# Altium PCB GD_AirIrDA.PcbDoc
Units mil, origin at the board's own origin, x right, y up, seen from the top; angles counter-clockwise.
Board outline 3149.61 x 2007.87 mil, 2 copper layers (Top Layer, Bottom Layer); 77 components, 62 nets, 262 pads, 118 vias.
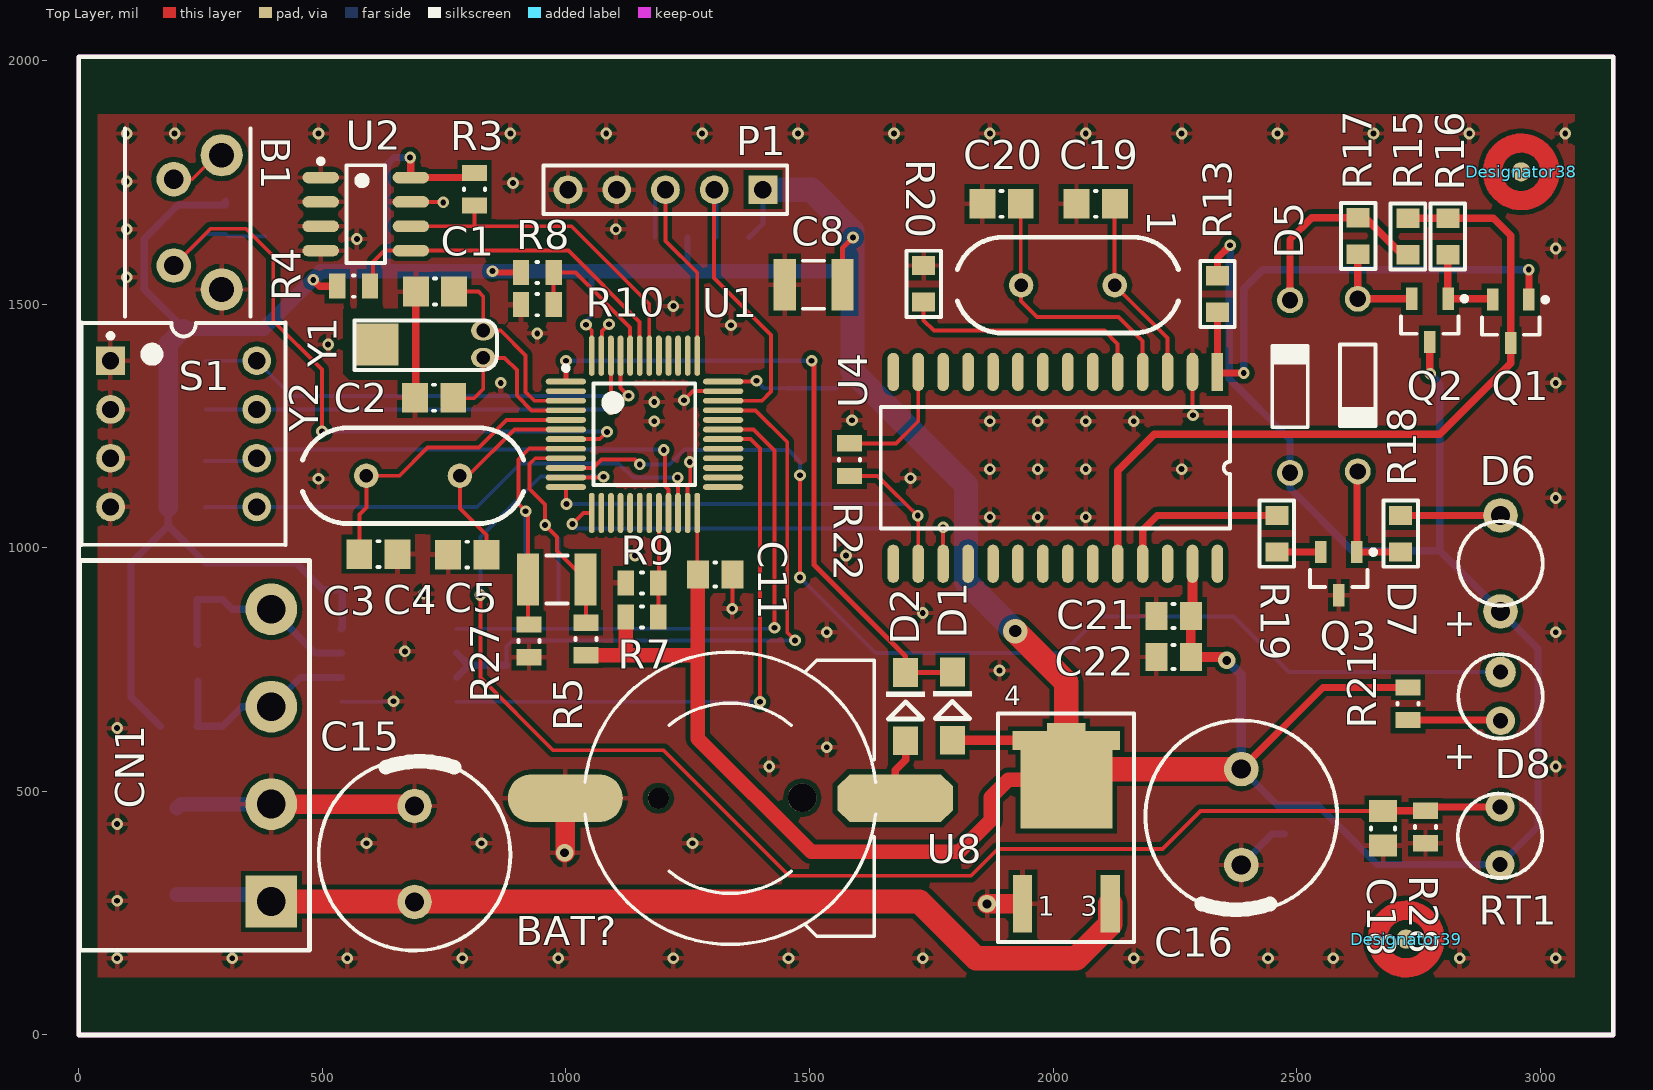
[diagram p0: Top Layer view]
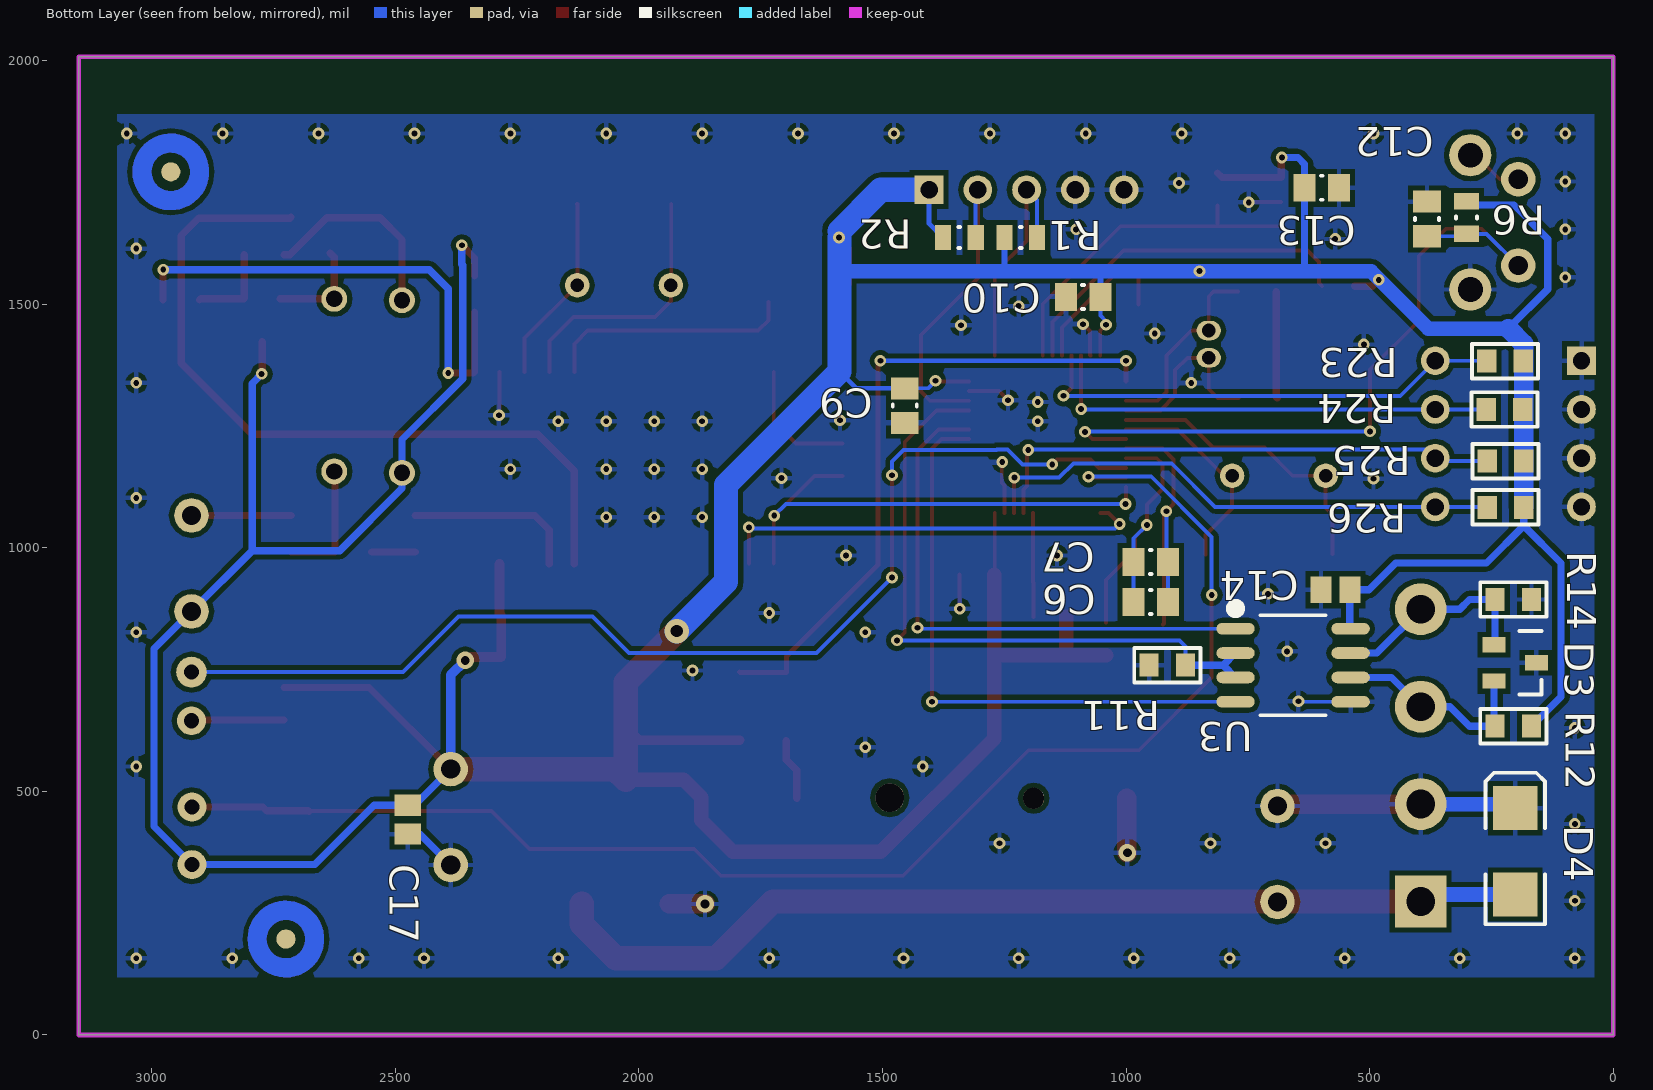
[diagram p1: Bottom Layer view, seen from below]

## Layer stack, top to bottom
Top Solder: solder mask 0.4, Solder Resist, Dk 3.5
Top Layer: signal copper 1.4
Dielectric 1: dielectric 12.6, FR-4, Dk 4.8
Bottom Layer: signal copper 1.4
Bottom Solder: solder mask 0.4, Solder Resist, Dk 3.5

## Board outline
0,0 3149.61,0 3149.61,2007.87 0,2007.87

## Design rules (kind name [scope] priority, off if disabled: settings)
Clearance [InPolygon] p1: gap=10 except(5: Track-SMDPad SMDPad-SMDPad)
Clearance Clearance_1 [All] p2: gap=10 except(5: Track-SMDPad SMDPad-SMDPad)
DiffPairsRouting [All] p1: maxlimit=10 minlimit=10 mostfreqgap=10 toplayer_minwidth=15 toplayer_maxwidth=15 toplayer_prefwidth=15 bottomlayer_minwidth=15 bottomlayer_maxwidth=15 bottomlayer_prefwidth=15 maxuncoupledlength=500
PlaneClearance [All] p1: clearance=40
PolygonConnect [All] p1: connectstyle=Relief reliefconductorwidth=10 reliefentries=4 polygonreliefangle="90 Angle" airgapwidth=10
RoutingVias [All] p1: holewidth=12 width=24 viastyle="Through Hole" minholewidth=12 minwidth=24 maxholewidth=28 maxwidth=50
SilkToSilkClearance [All] p1 off: silktosilkclearance=1
SilkToSolderMaskClearance [IsPad] p1 off: minsilkscreentomaskgap=10 clearancetoexposedcopper=TRUE
SolderMaskExpansion [All] p1: expansion=4
UnpouredPolygon [All] p1: allowunpoured=FALSE
Width [All] p1: maxlimit=50 minlimit=8 preferedwidth=15
25 further rules are at their usual default settings.

## Classes and differential pairs
component class GD_AirIrDA_Top: C18 D8 R21 R23 R24 R25 R26 R28 RT1 S1
component class U_GD_AirIrDA_MCU: B1 BAT? C1 C2 C3 C4 C5 C6 C7 C8 C9 C10 C11 C12 C13 D1 D2 P1 R1 R2 R3 R4 R5 R6 R7 R8 R9 R10 R27 U1 U2 Y1 Y2
component class U_GD_AirIrDA_485: C14 C15 C16 C17 CN1 D3 D4 R11 R12 R14 U3 U8
component class U_GD_AirIrDA_IrDA: 1 C19 C20 C21 C22 D5 D6 D7 Q1 Q2 Q3 R13 R15 R16 R17 R18 R19 R20 R22 U4
differential pair RS485: +RS485_P -RS485_N

## Components (designator, comment, footprint, x,y, rotation, side; value= is the part's Value field where it differs from the comment)
1 "12MHz" XTAL_US 1934.2,1538.94 r0 top
B1 "TVSE-21L" Button_V 244.2,1667.94 r270 top
BAT? "BATT" BATM 1337.2,485.94 r90 top
C1 "CAP 22pF 50V 0805(2012)" CAPC0805(2012)75_M 731.2,1525.94 r180 top
C2 "CAP 22pF 50V 0805(2012)" CAPC0805(2012)75_M 729.2,1307.94 r0 top
C3 "CAP 22pF 50V 0805(2012)" CAPC0805(2012)75_M 615.2,986.94 r180 top
C4 "CAP 22pF 50V 0805(2012)" CAPC0805(2012)75_M 797.2,985.94 r0 top
C5 "CAP 10uF 10V 1210(3225)" CAPC1210(3225)170_N 981.2,934.94 r0 top
C6 "CAP 0.01uF 50V 0805(2012)" CAPC0805(2012)100_N 949.2,888.94 r0 bottom
C7 "CAP 0.1uF 50V 0805(2012)" CAPC0805(2012)100_N 949.2,970.94 r0 bottom
C8 "CAP 10uF 10V 1210(3225)" CAPC1210(3225)170_N 1508.2,1539.94 r0 top
C9 "CAP 0.1uF 50V 0805(2012)" CAPC0805(2012)100_N 1454.2,1291.94 r90 bottom
C10 "CAP 0.1uF 50V 0805(2012)" CAPC0805(2012)100_N 1088.2,1514.94 r180 bottom
C11 "CAP 0.1uF 50V 0805(2012)" CAPC0805(2012)100_N 1306.2,944.94 r180 top
C12 "CAP 0.1uF 50V 0805(2012)" CAPC0805(2012)100_N 382.2,1674.94 r270 bottom
C13 "CAP 0.1uF 50V 0805(2012)" CAPC0805(2012)100_N 598.2,1738.94 r0 bottom
C14 "CAP" C0805 570.2,913.94 r0 bottom
C15 "CAPACITOR" CA10X16P5 689.2,469.94 r270 top
C16 "CAPACITOR" CA10X16P5 2386.2,348.94 r90 top
C17 "CAP" C0805 2474.2,441.94 r90 bottom
C18 "CAP 0.1uF 50V 0805(2012)" CAPC0805(2012)100_N 2677.2,423.94 r90 top
C19 "CAP 22pF 50V 0805(2012)" CAPC0805(2012)75_M 2087.2,1705.94 r180 top
C20 "CAP 22pF 50V 0805(2012)" CAPC0805(2012)75_M 1894.2,1705.94 r180 top
C21 "CAP 0.01uF 50V 0805(2012)" CAPC0805(2012)100_N 2247.2,859.94 r0 top
C22 "CAP 0.1uF 50V 0805(2012)" CAPC0805(2012)100_N 2247.2,775.94 r0 top
CN1 "Header 4" HT5.08-4P-H 395.2,273.94 r90 top
D1 "1N4148" DIODE_SOP 1793.2,604.94 r90 top
D2 "1N4148" DIODE_SOP 1697.2,603.94 r90 top
D3 "TVS-D" SOT23-123 205.2,763.94 r270 bottom
D4 "ZENER" SMB 201.2,376.94 r90 bottom
D5 "1N4148" NXP-SOD27-2_V 2486.2,1330.94 r90 top
D6 "IR" LED-5.0 2918.2,967.94 r90 top
D7 "1N4148" NXP-SOD27-2_V 2625.2,1333.94 r270 top
D8 "RED-LED" LED_DIP 2918.2,694.94 r90 top
Designator38 "Comment" MARK2 2960.63,1771.65 r0 top
Designator39 "Comment" MARK2 2724.41,196.85 r0 top
P1 "IIS" HDR1X5 1404.2,1734.94 r180 top
Q1 "QNPN" SOT-23B_N 2939.2,1464.94 r270 top
Q2 "PNP" SOT-23B_N 2773.2,1466.94 r270 top
Q3 "QNPN" SOT-23B_N 2586.2,946.94 r270 top
R1 "10K 5% 0805(2012)" RESC0805(2012)_L 1216.2,1636.94 r180 bottom
R2 "10K 5% 0805(2012)" RESC0805(2012)_L 1342.2,1636.94 r180 bottom
R3 "4.7K 5% 0805(2012)" RESC0805(2012)_L 812.2,1735.94 r270 top
R4 "4.7K 5% 0805(2012)" RESC0805(2012)_L 564.2,1536.94 r0 top
R5 "10Ohm 5% 0805(2012)" RESC0805(2012)_L 1041.2,812.94 r90 top
R6 "10K 5% 0805(2012)" RESC0805(2012)_L 301.2,1677.94 r270 bottom
R7 "10K 5% 0805(2012)" RESC0805(2012)_L 1156.2,857.94 r0 top
R8 "10K 5% 0805(2012)" RESC0805(2012)_L 941.2,1564.94 r0 top
R9 "10K 5% 0805(2012)" RESC0805(2012)_L 1156.2,927.94 r180 top
R10 "10K 5% 0805(2012)" RESC0805(2012)_L 941.2,1498.94 r180 top
R11 "RES" R0805 915.2,758.94 r180 bottom
R12 "RES" R0805 205.2,633.94 r0 bottom
R13 "10K" R0805 2337.2,1520.94 r90 top
R14 "RES" R0805 205.2,893.94 r180 bottom
R15 "12K" R0805 2728.2,1638.94 r270 top
R16 "15K" R0805 2810.2,1638.94 r270 top
R17 "27K" R0805 2626.2,1639.94 r90 top
R18 "1R" R0805 2713.2,1028.94 r90 top
R19 "1k" R0805 2459.2,1028.94 r270 top
R20 "1M" R0805 1734.2,1541.94 r270 top
R21 "470 Ohm 5% 0805(2012)" RESC0805(2012)_L 2728.2,679.94 r90 top
R22 "10K 5% 0805(2012)" RESC0805(2012)_L 1582.2,1180.94 r270 top
R23 "RES" R0805 222.2,1382.94 r0 bottom
R24 "RES" R0805 223.2,1283.94 r0 bottom
R25 "RES" R0805 221.2,1177.94 r0 bottom
R26 "RES" R0805 221.2,1082.94 r0 bottom
R27 "0 Ohm 5% 0805(2012)" RESC0805(2012)_L 924.2,808.94 r90 top
R28 "10K 5% 0805(2012)" RESC0805(2012)_L 2764.2,426.94 r270 top
RT1 "MF52 10K 3950K" NTC-MF52 2917.2,408.94 r90 top
S1 "SW-DIP4" SW_4P 215.2,1233.94 r0 top
U1 "STM32F103C8T6TR" STM-LQFP48_M 1161.2,1232.94 r0 top
U2 "AT24C02BN-SP25-T" 8S1_L 589.2,1684.94 r0 top
U3 "SN65HVD08D" SOIC8 775.2,833.94 r270 bottom
U4 "KT-003" IR-IC 2337.2,1360.94 r270 top
U8 "LM1117_ADJ" DPAK-134 2027.2,450.94 r0 top
Y1 "32.768K" XTAL32 830.2,1389.94 r180 top
Y2 "8MHz" XTAL_US 590.2,1147.94 r0 top

## Footprints (in the part's own frame and the unit in brackets; to place one, negate y for a bottom-side part, rotate by r counter-clockwise, add the part's x,y. Pads: shape width x height; smd on the part's side, far side on the other; paste and mask are expansions set on the pad)
8S1_L [mm] "SOIC, 8-Leads, Body 4.9x3.9mm, Pitch 1.27mm, IPC High Density"
  oval 1.9x0.6 smd: 1(-2.35,1.905) 2(-2.35,0.635) 3(-2.35,-0.635) 4(-2.35,-1.905) 5(2.35,-1.905) 6(2.35,-0.635) 7(2.35,0.635) 8(2.35,1.905)
  silkscreen extent -2.47,-2.55 1,2.88, body extent -1.99,-2.52 1.99,2.52, height 1.75
BATM [mm]
  round 1.1 hole 1.1 unplated: 0(0,3.748)
  round 1.5 hole 1.5 unplated: 0(0.025,-3.752)
  oct 2.5x6 smd: 1(0,-8.602)
  oval 2.5x6 smd: 2(0,8.598)
  silkscreen extent -7.62,-7.58 7.62,7.57
Button_V [mm] "6.3X6.3X13.8"
  round 1.8 hole 1: 1(-2.25,-1.25) 2(2.25,-1.25)
  round 2.2 hole 1.3: 3(-3.5,1.25) 4(3.5,1.25)
  silkscreen extent -4.9,-3.8 4.9,2.75, body extent -5,-13.25 5,2.85, height 7
C0805 [mm] "Chip Capacitor, Body 2.0x1.3mm, IPC High Density"
  rect 1.1x1.4 smd: 1(-0.75,0) 2(0.75,0)
  body extent -1.1,-0.72 1.1,0.72, height 1.4
CA10X16P5 [mm]
  round 1.8 hole 1: 1(0,0) 2(5,0)
  silkscreen extent -2.46,-5 7.54,5, body extent -2.47,-5.01 7.55,5.01, height 16
CAPC0805(2012)75_M [mm] "Chip Capacitor, Body 2.0x1.2mm, Height 0.75mm, IPC Low Density"
  rect 1.35x1.55 smd: 1(-1,0) 2(1,0)
  silkscreen extent -0.05,-0.67 0.05,0.67, body extent -1.1,-0.72 1.1,0.72, height 0.75
CAPC0805(2012)100_N [mm] "Chip Capacitor, Body 2.0x1.2mm, Height 1.0mm, IPC Medium Density"
  rect 1.15x1.45 smd: 1(-0.9,0) 2(0.9,0)
  silkscreen extent -0.05,-0.62 0.05,0.63, body extent -1.1,-0.72 1.1,0.73, height 1
CAPC1210(3225)170_N [mm] "Chip Capacitor, Body 3.2x2.5mm, Height 1.7mm, IPC Medium Density"
  rect 1.15x2.7 smd: 1(-1.5,0) 2(1.5,0)
  silkscreen extent -0.55,-1.25 0.55,1.25, body extent -1.7,-1.35 1.7,1.35, height 1.7
DIODE_SOP [mm]
  rect 1.5x1.3 smd: 1(0,0) 2(3.556,0)
  silkscreen extent 1.14,-1.02 2.56,1.02
DPAK-134 [mm] "LD1117"
  rect 1x3 smd: 1(-2.285,-4.6) 3(2.285,-4.6)
  rect 0.4x1 smd: 4(-2.6,3.9) 4(2.6,3.9)
  rect 4.8x5.1 smd: 4(0,1.85)
  rect 2x0.4 smd: 4(0,4.6)
  silkscreen extent -3.58,-6.6 3.52,5.3, body extent -3.15,-6.45 3.15,5.15, height 2.4
HDR1X5 [mm]
  rect 1.5x1.5 hole 0.9: 1(0,0)
  round 1.5 hole 0.9: 2(2.54,0) 3(5.08,0) 4(7.62,0) 5(10.16,0)
  silkscreen extent -1.27,-1.27 11.43,1.27
HT5.08-4P-H [mm]
  rect 2.7x2.7 hole 1.5: 1(0,0)
  round 2.7 hole 1.5: 2(5.08,0) 3(10.16,0) 4(15.24,0)
  silkscreen extent -2.54,-2 17.78,10, body extent -2.54,-2.03 17.78,10.03, height 12
IR-IC [mm]
  rect 2x0.6 smd: 1(0,0)
  oval 2x0.6 smd: 2(0,-1.3) 3(0,-2.6) 4(0,-3.9) 5(0,-5.2) 6(0,-6.5) 7(0,-7.8) 8(0,-9.1) 9(0,-10.4) 10(0,-11.7) 11(0,-13) 12(0,-14.3) 13(0,-15.6) 14(0,-16.9) 15(10,-16.9) 16(10,-15.6) 17(10,-14.3) 18(10,-13) 19(10,-11.7) 20(10,-10.4) 21(10,-9.1) 22(10,-7.8) 23(10,-6.5) 24(10,-5.2) 25(10,-3.9) 26(10,-2.6) 27(10,-1.3) 28(10,0)
  silkscreen extent 1.84,-17.55 8.17,0.65
LED-5.0 [mm]
  round 1.8 hole 1: 1(-2.5,0) 2(2.5,0)
  silkscreen extent -2.2,-2.2 2.2,2.2, body extent -2.48,-2.49 2.5,2.5, height 10
LED_DIP [mm]
  round 1.5 hole 0.8: 1(-1.27,0)
  round 1.6 hole 0.8: 2(1.27,0)
  silkscreen extent -2.2,-2.2 2.2,2.2, body extent -2.18,-2.2 2.2,2.2, height 5
MARK2 [mm]
  round 1 smd: 1(0,0)
  round 1 smd far side: 1(0,0)
  Top Layer circle w1: c0,0 r1.5
  Bottom Layer circle w1: c0,0 r1.5
NTC-MF52 [mm]
  round 1.5 hole 0.8: 1(-1.5,0) 2(1.5,0)
  silkscreen extent -2.2,-2.2 2.2,2.2, body extent -2.48,-2.49 2.5,2.5, height 10
NXP-SOD27-2_V [mm] "SOD27, 2-Leads, Dia 1.85mm, Body Length 4.25mm, Pin Spacing 9mm"
  round 1.35 hole 0.85: 1(-4.5,0) 2(4.5,0)
  silkscreen extent -2.12,-0.93 2.13,0.92, body extent -4.78,-0.92 4.78,0.92, height 1.84
R0805 [mm]
  rect 1x1.2 smd: 1(-0.95,0) 2(0.95,0)
  silkscreen extent -1.73,-0.9 1.73,0.9, body extent -1.55,-0.7 1.55,0.7, height 1
RESC0805(2012)_L [mm] "Chip Resistor, Body 2.0x1.3mm, IPC High Density"
  rect 0.85x1.3 smd: 1(-0.85,0) 2(0.85,0)
  silkscreen extent -0.05,-0.55 0.05,0.55, body extent -1.1,-0.67 1.1,0.68, height 0.7
SMB [mm] "DO-214-AA/SMB; 2 C-Bend Leads; Body 5.3 x 3.6 mm, inc. leads (LxW)"
  rect 2.3x2.3 smd: 1(-2.25,0) 2(2.25,0)
  silkscreen extent -3.8,-1.55 4.1,1.55
SOIC8 [mm]
  oval 0.61x2 smd: 1(0,0) 2(1.27,0) 3(2.54,0) 4(3.81,0) 5(3.81,6) 6(2.54,6) 7(1.27,6) 8(0,6)
  silkscreen extent -1.3,-0.25 4.51,4.7, body extent -0.7,1.3 4.51,4.7, height 1.75
SOT23-123 [mm]
  rect 0.8x1.2 smd: 1(-0.95,-1) 2(0.95,-1) 3(0,1.2)
  silkscreen extent -1.65,0.33 1.65,1.48, body extent -1.6,-1.3 1.6,1.3, height 1.2
SOT-23B_N [mm] "SOT23, 3-Leads, Body 2.9x1.3mm, Pitch 0.95mm, Lead Span 2.4mm, IPC Medium Density"
  rect 1.15x0.6 smd: 1(-1.125,0.95) 2(-1.125,-0.95) 3(1.125,0)
  silkscreen extent -1.25,-1.5 0.7,1.93, body extent -0.7,-1.5 0.7,1.5, height 1.14
STM-LQFP48_M [mm] "QFP, 48-Leads, Body 7x7mm, Pitch 0.5mm, IPC Low Density"
  oval 2.1x0.3 smd: 1(-4.1,2.75) 2(-4.1,2.25) 3(-4.1,1.75) 4(-4.1,1.25) 5(-4.1,0.75) 6(-4.1,0.25) 7(-4.1,-0.25) 8(-4.1,-0.75) 9(-4.1,-1.25) 10(-4.1,-1.75) 11(-4.1,-2.25) 12(-4.1,-2.75) 25(4.1,-2.75) 26(4.1,-2.25) 27(4.1,-1.75) 28(4.1,-1.25) 29(4.1,-0.75) 30(4.1,-0.25) 31(4.1,0.25) 32(4.1,0.75) 33(4.1,1.25) 34(4.1,1.75) 35(4.1,2.25) 36(4.1,2.75)
  oval 0.3x2.1 smd: 13(-2.75,-4.1) 14(-2.25,-4.1) 15(-1.75,-4.1) 16(-1.25,-4.1) 17(-0.75,-4.1) 18(-0.25,-4.1) 19(0.25,-4.1) 20(0.75,-4.1) 21(1.25,-4.1) 22(1.75,-4.1) 23(2.25,-4.1) 24(2.75,-4.1) 37(2.75,4.1) 38(2.25,4.1) 39(1.75,4.1) 40(1.25,4.1) 41(0.75,4.1) 42(0.25,4.1) 43(-0.25,4.1) 44(-0.75,4.1) 45(-1.25,4.1) 46(-1.75,4.1) 47(-2.25,4.1) 48(-2.75,4.1)
  silkscreen extent -4.22,-2.65 2.65,3.57, body extent -3.5,-3.5 3.5,3.5, height 1.6
SW_4P [mm]
  rect 1.5x1.5 hole 0.9: 1(-3.81,3.81)
  round 1.5 hole 0.9: 2(-3.81,1.27) 3(-3.81,-1.27) 4(-3.81,-3.81) 5(3.81,-3.81) 6(3.81,-1.27) 7(3.81,1.27) 8(3.81,3.81)
  silkscreen extent -5.32,-5.81 5.32,5.81, body extent -5.33,-5.71 5.33,5.71, height 9.8
XTAL32 [mil]
  oval 50x40 hole 28: 1(0,0) 2(0,-56)
  rect 92.13x86 smd: ""(220,-27)
  silkscreen extent -28,-77 264,25
XTAL_US [mil]
  round 50 hole 28: 1(0,0) 2(192.13,0)
  silkscreen extent -131,-98 323,98

## Part data
1 Y2: library part XTAL, "Crystal Oscillator"
B1: library part ES00012, "Button ON/OFF，11.85MM,DIP-4"
BAT?: library part BAT
C1 C2 C3 C4 C19 C20: library part CMP-1036-01234-1, "CAP 22pF 50V ±1% 0805 (2012 Metric) Thickness 0.75mm SMD"
C5 C8: library part CMP-1038-02199-1, "CAP 10uF 10V ±20% 1210 (3225 Metric) Thickness 1.7mm SMD"
C6 C7 C9 C10 C11 C12 C13 C18 C21 C22: library part CMP-1036-00070-1, "CAP 0.1uF 50V ±20% 0805 (2012 Metric) Thickness 1mm SMD"
C14 C17: library part EC00014, "CAP SMD CR X7R 50V 10% 0.1uF 0805 ROHS"
C15 C16: library part EC00095, "CAP 35V 20% 330uF 10X16X0.6MM ROHS，7000hours"
CN1: "Header, 4-Pin"
D1 D2: library part D
D3: library part ED00007, "DIODE TVS 7V 12V 17A 400W SOT-23 SMD ROHS"
D4: library part ED00032
D5 D7: library part CMP-0648-00002-1, "High-speed Diode, 100 V, 450 mA, 2-Pin SOD27, RoHS"
D6 D8: library part LED
P1: library part "Header 5", "Header, 5-Pin"
Q1 Q3: "NPN Bipolar Transistor"
Q2: "PNP Bipolar Transistor"
R1 R2 R6 R7 R8 R9 R10 R22 R28: library part CMP-1013-00098-1, "10K 0.125W 5% 0805 (2012 Metric)  SMD"
R3 R4: library part CMP-1013-00098-1, "4.7K 0.125W 5% 0805 (2012 Metric)  SMD"
R5 R27: library part CMP-1013-00098-1, "10Ohm 0.125W 5% 0805 (2012 Metric)  SMD"
R11 R23 R24 R25 R26: library part ER00213, "RES THICK_FILM SMD 10K ohm 5% 1/10W ROHS 0603"
R12 R14: library part ER00021, "RES THICK_FILM SMD 39K 5% 1/8W ROHS 0805"
R13 R15 R16 R17 R18 R19 R20: library part RES2
R21: library part CMP-1013-00098-1, "470Ohm 0.125W 5% 0805 (2012 Metric)  SMD"
RT1: library part "Res Thermal", "Thermistor"
S1: "侧拨 4位"
U1: library part CMP-0237-00216-3, "ARM Cortex-M3 32-bit MCU, 64 KB Flash, 20 KB Internal RAM, 37 I/Os, 48-pin LQFP, -40 to 85 degC, Tape and Reel"
U2: library part CMP-0152-00023-1, "2Kbit (256 x 8), 2-wire Bus Automotive Serial EEPROM with full memory Write Protect, 2.5V, 8-Pin SOIC, Tape & Reel"
U3: library part EU00041, "IC 5V,RS-485,10Mbps,16KV,TRANSCEIVERS,SOIC-8,ROHS"
U8: library part EU00066, "IC REG VOLT +3.3V LDO 800MA DPAK ROHS"
Y1: library part XTAL_1, "Crystal Oscillator"

## Via types
v1: diameter 24, hole 12, Top Layer to Bottom Layer, tented both sides, 109 vias
v2: diameter 24, hole 12, Top Layer to Bottom Layer, 5 vias
v3: diameter 36, hole 18, Top Layer to Bottom Layer, tented both sides, 3 vias
v4: diameter 50, hole 25, Top Layer to Bottom Layer, tented both sides, 1 vias

## Nets (pads, with @x,y where several pads share a name; then routed paths per layer and width w, separated by ;. In a path a pad name is that pad's centre, name@x,y a point inside that pad or via, vN(x,y) a via of type N, cw(c..) or ccw(c..) an arc to the next point about the centre after c; other vN are vias at no path point)
3.3V: C8.2 C9.2 C10.2 C11.2 C13.2 C14.1 C16.2 C17.2 C21.2 C22.2 D1.1 D5.1 D6.1 P1.1 Q2.3 R1.1 R2.1 R3.1 R4.1 R5.1 R6.1 R7.1 R8.1 R12.1 R13.2 R21.2 R23.1 R24.1 R25.1 R26.1 RT1.1 U1.24 U1.36 U1.48 U2.8 U3.8 U4.27 U8.4 | length 12235.4
  Top Layer w8: v1@1049.2,1457.94 v1(1041.2,1457.94) 1052.93,1446.2 U1.48 ; U1.24 1269.46,946.24 C11.2 ; U1.36 1389.46,1341.2 v1(1391.2,1342.94)
  Top Layer w10: C8.2 1567.25,1614.99 v1(1589.2,1636.94)
  Top Layer w12: v1(849.2,1567.94) 852.2,1564.94 R8.1
  Top Layer w15: v1(481.2,1549.94) 494.2,1536.94 R4.1 ; v1(680.2,1800.94) 681.72,1799.42 U2.8 802.73,1759.94 R3.1 ; R13.2 2337.2,1594.94 v1(2363.2,1620.94) ; C16.2 2553.81,713.4 R21.2 ; Q2.3 2773.2,1357.94 v1(2774.2,1356.94)
  Top Layer w20: U8.4@1924.83,604.94 D1.1 2000.09,604.94 U8.4@2027.2,632.04 ; U4.27 2286.02,863.32 C21.2 C22.2 2349.2,775.94 v3(2356.2,768.94)
  Top Layer w30: R5.1 1120.2,779.47 ; R7.1 1122.73,782.01 1120.2,779.47 ; C11.2 1270.76,776.65 ; U8.4@2027.2,523.77 1908.03,523.77 1872.2,487.94 1872.2,440.94 1807.2,375.94 1503.2,375.94 1270.76,608.37 1270.76,776.65 ; 1120.2,779.47 1267.94,779.47 1270.76,776.65
  Top Layer w50: v4(1922.2,828.94) 2027.2,723.94 2027.2,632.04 2027.2,523.77 2049.21,545.79 C16.2
  Bottom Layer w8: v1(1041.2,1457.94) 1041.2,1464.94 1052.76,1476.5 C10.2 ; v1(1391.2,1342.94) 1406.76,1327.37 C9.2
  Bottom Layer w10: R2.1 1404.2,1665.47 P1.1 ; C9.2 1553.63,1327.37 1588.2,1361.94
  Bottom Layer w12: 1051.2,1567.94 1052.76,1566.37 C10.2 ; 1247.2,1567.94 1249.66,1570.4 R1.1
  Bottom Layer w15: R12.1 107.2,694.54 107.2,968.94 183.8,1045.54 ; R26.1 183.8,1045.54 ; 215.2,1449.94 134.2,1530.94 134.2,1633.94 203.85,1703.59 301.2,1703.59 R6.1 ; U3.8 540.67,835.63 C14.1 501.2,913.94 446.2,968.94 260.2,968.94 183.8,1045.34 183.8,1045.54 ; 638.2,1567.94 633.63,1572.5 C13.2 633.63,1787.37 647.2,1800.94 v1(680.2,1800.94) ; v1(2363.2,1620.94) 2363.2,1581.61 2361.7,1580.11 2361.7,1346.72 2486.2,1222.22 D5.1 2486.2,1121.94 2614.2,993.94 2793.77,993.94 ; C16.2 2460.52,471.46 C17.2 2543.67,471.46 2665.25,349.88 RT1.1 2995.2,427.88 2995.2,792.51 D6.1 2793.77,993.94 ; v1(2774.2,1356.94) 2793.77,1337.36 2793.77,993.94
  Bottom Layer w20: v3(2356.2,768.94) 2386.2,738.94 C16.2
  Bottom Layer w30: 215.2,1449.94 379.2,1449.94 497.2,1567.94 638.2,1567.94 v1(849.2,1567.94) 1051.2,1567.94 1247.2,1567.94 1588.2,1567.94
  Bottom Layer w40: R26.1 R25.1 183.8,1418.54 215.2,1449.94
  Bottom Layer w50: P1.1 1503.2,1734.94 1588.2,1649.94 ; v1@1588.2,1636.94 1588.2,1567.94 1588.2,1361.94 1821.2,1128.94 1821.2,929.94 v4(1922.2,828.94)
5V: C15.2 CN1.1 D4.1 U8.3 | length 2042.8
  Top Layer w50: CN1.1 1725.2,273.94 1841.65,157.48 2047.24,157.48 2117.16,227.39 U8.3
  Bottom Layer w30: D4.1 380.78,288.35 CN1.1
  Bottom Layer w50: C15.2@688.35,273.94 C15.2
ADDR1: R23.2 S1.8 U1.45 | length 988
  Top Layer w8: U1.45 1111.98,1328.15 v1(1128.2,1311.94)
  Bottom Layer w8: R23.2 260.6,1383.94 S1.8 437.2,1311.94 v1(1128.2,1311.94)
ADDR2: R24.2 S1.7 U1.46 | length 941.5
  Top Layer w8: v1(1092.2,1284.94) 1092.3,1284.94 U1.46
  Bottom Layer w8: R24.2 S1.7 1091.2,1283.94 v1(1092.2,1284.94)
ADDR3: R25.2 S1.6 U1.21 | length 1085.9
  Top Layer w8: v1(1200.79,1200.79) 1203.2,1198.38 1203.2,1126.94 1210.41,1119.72 U1.21
  Bottom Layer w8: R25.2 359.2,1177.94 S1.6 383.2,1201.94 1199.64,1201.94 v1(1200.79,1200.79)
ADDR4: R26.2 S1.5 U1.22 | length 1092.7
  Top Layer w8: v1(1229.2,1143.94) 1230.09,1143.04 U1.22
  Bottom Layer w8: R26.2 259.6,1083.94 S1.5 817.2,1083.94 906.2,1172.94 1108.2,1172.94 1137.2,1143.94 v1(1229.2,1143.94)
BOOT0: R8.2 R10.1 U1.44 | length 327.7
  Top Layer w8: R10.1 R8.2 1019.2,1564.94 1131.67,1452.46 U1.44
BOOT1: R7.2 R9.1 U1.20 | length 214
  Top Layer w8: R7.2 R9.1 1190.72,929 U1.20
GND: B1.4 BAT?.2 C1.2 C2.1 C3.1 C4.1 C8.1 C9.1 C10.1 C11.1 C12.1 C13.1 C14.2 C15.1 C16.1 C17.1 C18.1 C19.2 C20.2 C21.1 C22.1 CN1.2 D3.3 D4.2 P1.4 P1.5 Q3.3 R9.2 R10.2 R11.1 R14.2 R20.1 R27.1 R28.2 S1.1 S1.2 S1.3 S1.4 U1.23 U1.35 U1.47 U2.1 U2.2 U2.3 U2.4 U2.7 U3.5 U4.2 U8.1 | length 1612.7
  Top Layer w8: U2.7 747.2,1709.94 v1(748.2,1708.94) ; U1.47 1074.3,1396.04 1074.3,1444.69 1088.2,1458.59 v1(1088.2,1458.94) ; v1(1242.2,1302.94) 1260.78,1321.52 U1.35 ; U1.23 1249.78,1127.75 1255.2,1133.17 1255.2,1174.94 v1(1254.2,1175.94) ; v1(1341.2,874.94) 1341.63,875.37 C11.1 ; U4.2 2286.02,1273.12 v1(2287.2,1271.94)
  Top Layer w15: C2.1 691.83,1309.94 C1.2
  Top Layer w40: CN1.2 685.2,473.94 C15.1 ; v3(997.2,373.94) 998.68,375.42 BAT?.2 ; v3(1864.2,268.94) 1865.09,269.83 U8.1
  Bottom Layer w8: U3.5 645.2,683.94 v1(646.2,684.94)
  Bottom Layer w15: C16.1 2449.67,412.41 C17.1
  Bottom Layer w30: D4.2 209.61,473.94 CN1.2
  other v1: 78.74,157.48 314.96,157.48 551.18,157.48 787.4,157.48 984.25,157.48 1220.47,157.48 1456.69,157.48 1732.28,157.48 2165.35,157.48 2440.94,157.48 2574.8,157.48 2834.65,157.48 3031.5,157.48 78.74,275.59 590.55,393.7 826.77,393.7 1259.84,393.7 78.74,433.07 1417.32,551.18 3031.5,551.18 1535.43,590.55 78.74,629.92 1889.76,748.03 669.29,787.4 1535.43,826.77 3031.5,826.77 1732.28,866.14 708.66,905.51 1141.73,984.25 1574.8,984.25 1870.08,1062.99 1968.5,1062.99 2066.93,1062.99 3031.5,1102.36 492.13,1141.73 1707.2,1142.94 1870.08,1161.42 1968.5,1161.42 2066.93,1161.42 2263.78,1161.42 1181.1,1259.84 1870.08,1259.84 1968.5,1259.84 2066.93,1259.84 2165.35,1259.84 1587.2,1261.94 1181.1,1299.21 866.14,1338.58 3031.5,1338.58 511.81,1417.32 1338.58,1456.69 1220.47,1496.06 98.43,1555.12 3031.5,1614.17 570.87,1633.86 98.43,1653.54 1102.36,1653.54 98.43,1751.97 98.43,1850.39 196.85,1850.39 492.13,1850.39 885.83,1850.39 1082.68,1850.39 1279.53,1850.39 1476.38,1850.39 1673.23,1850.39 1870.08,1850.39 2066.93,1850.39 2263.78,1850.39 2460.63,1850.39 2657.48,1850.39 2854.33,1850.39 3051.18,1850.39
  other v2: 941.2,1439.94 891.2,1748.94
I2C1_SCL: R3.2 U1.42 U2.6 | length 704.2
  Top Layer w8: U2.6 813.2,1659.94 ; R3.2 812.2,1660.94 813.2,1659.94 ; U1.42 1171.04,1500.09 1011.2,1659.94 813.2,1659.94
I2C1_SDA: R4.2 U1.43 U2.5 | length 739.4
  Top Layer w8: R4.2 604.2,1543.47 604.2,1586.94 627.2,1609.94 U2.5 1005.2,1609.94 1151.35,1463.78 U1.43
Net1_1: 1.1 C20.1 U4.4 | length 546.4
  Top Layer w8: C20.1 1933.57,1539.57 1.1 1934.2,1506.94 1967.2,1473.94 2134.2,1473.94 2183.65,1424.48 U4.4
Net1_2: 1.2 C19.1 U4.3 | length 390
  Top Layer w8: C19.1 2126.32,1705.69 1.2 2234.83,1430.43 U4.3
NetB1_1: B1.1 B1.3 | length 118.8
  Top Layer w8: B1.1 232.9,1756.52 282.11,1805.73 B1.3
NetB1_2: B1.2 C12.2 R6.2 U1.7 | length 1552.4
  Top Layer w8: B1.2 270.57,1654.94 343.2,1654.94 399.2,1598.94 399.2,1465.84 499.2,1365.84 v1(499.2,1238.94) ; U1.7 1069.35,1223.09 v1(1084.2,1237.94)
  Bottom Layer w8: B1.2 260.1,1644.47 R6.2 306.17,1639.5 C12.2 ; v1(499.2,1238.94) 1083.2,1238.94 v1(1084.2,1237.94)
NetBAT?_1: BAT?.1 D2.1 | length 126.8
  Top Layer w15: BAT?.1 1675.84,543.58 1697.2,564.94 D2.1
NetC18_2: C18.2 R28.1 RT1.2 U1.11 | length 2990.4
  Top Layer w8: v1(824.2,902.94) 824.2,733.94 973.61,584.52 1200.61,584.52 1458.2,326.94 1831.2,326.94 1886.2,381.94 2224.76,381.94 2302.2,459.37 C18.2 ; U1.11 1075.61,1144.35 v1(1077.2,1145.94)
  Top Layer w15: C18.2 2678.23,460.4 R28.1 2771.79,467.99 RT1.2
  Bottom Layer w8: v1(824.2,902.94) 824.2,1021.94 948.2,1145.94 v1(1077.2,1145.94)
NetD1_2: D1.2 D2.2 U1.1 | length 1362
  Top Layer w10: U1.1@999.78,1342.43 1000.2,1342.84 v1(1000.2,1383.94) ; v1(1504.2,1383.94) 1509.2,1378.94 1509.2,964.94 1697.2,776.94 D2.2 1792.2,743.94 D1.2
  Bottom Layer w10: v1(1000.2,1383.94) v1(1504.2,1383.94)
NetD5_2: D5.2 R15.2 R17.2 | length 416.6
  Top Layer w15: D5.2 2486.2,1632.94 2530.6,1677.34 R17.2 2640.8,1677.34 2716.6,1601.54 R15.2
NetD6_2: D6.2 R18.2 | length 205
  Top Layer w15: R18.2 D6.2
NetD7_1: D7.1 Q2.2 R17.1 | length 207.4
  Top Layer w15: R17.1@2633.2,1604.54 2625.2,1596.54 D7.1 2735.67,1511.1 Q2.2
NetD7_2: D7.2 Q3.1 R18.1 | length 255.9
  Top Layer w15: D7.2 2623.6,1155.17 Q3.1 2712.89,991.23 R18.1
NetD8_1: D8.1 R21.1 | length 190.6
  Top Layer w15: R21.1 2916.66,646.47 D8.1
NetD8_2: D8.2 U1.10 | length 2336
  Top Layer w8: U1.10 1055.77,1164.04 1072.83,1181.1 1141.73,1181.1 v2(1151.57,1171.26) ; v2(1480.2,938.94) v2(1480.2,1148.94)
  Top Layer w15: D8.2 D8.2@2918.2,747.63
  Bottom Layer w8: v2(1151.57,1171.26) 1212.75,1171.26 1243.43,1201.94 1264.97,1201.94 1266.12,1200.79 1456.69,1200.79 1480.2,1177.28 v2(1480.2,1148.94) ; v2(1480.2,938.94) 1635.2,783.94 2020.2,783.94 2095.2,858.94 2370.2,858.94 2484.2,744.94 D8.2
NetQ1_1: Q1.1 R13.1 U4.1 | length 1013.5
  Top Layer w15: R13.1 U4.1 2339.2,1358.94 v1(2391.2,1358.94) ; v1(2976.2,1570.94) 2976.6,1570.54 Q1.1
  Bottom Layer w15: v1(2391.2,1358.94) 2391.2,1531.94 2430.2,1570.94 v1(2976.2,1570.94)
NetQ1_2: Q1.2 Q2.1 R16.2 | length 182.5
  Top Layer w15: R16.2 2810.2,1511.63 Q2.1 2899.8,1511.23 Q1.2
NetQ1_3: Q1.3 R15.1 R16.1 U4.24 | length 1591.6
  Top Layer w15: U4.24 2132.47,1158.21 2207.2,1232.94 2793.2,1232.94 2939.2,1378.94 Q1.3 2939.2,1640.94 2903.8,1676.34 R16.1 R15.1 2716.2,1676.34 R15.1@2714.2,1678.34
NetQ3_2: Q3.2 R19.2 | length 89.7
  Top Layer w15: R19.2 2548.49,991.54 Q3.2
NetR11_2: R11.2 U1.33 U3.2 U3.3 | length 1356.7
  Top Layer w8: U1.33 1388.98,1282.15 1454.2,1216.94 1454.2,825.94 v1(1470.2,809.94)
  Bottom Layer w8: R11.2 877.8,797.54 890.2,809.94 v1(1470.2,809.94)
  Bottom Layer w15: U3.3 800.2,758.94 ; U3.2 800.2,758.94 ; R11.2 800.2,758.94
NetR19_1: R19.1 U4.25 | length 357.1
  Top Layer w15: U4.25 2183.65,1036.39 2213.6,1066.34 R19.1
NetR20_2: R20.2 U4.5 | length 513.6
  Top Layer w8: R20.2 1734.2,1466.94 1755.2,1445.94 2105.2,1445.94 2132.47,1418.66 U4.5
NetR22_1: R22.1 U4.13 | length 260.8
  Top Layer w8: R22.1 1677.66,1214.4 1723.02,1259.76 U4.13
NetR22_2: R22.2 U1.12 U4.16 | length 1038.5
  Top Layer w8: U1.12 999.78,1091.35 v1(1001.2,1089.94) ; R22.2 1639.66,1147.47 1723.02,1064.11 U4.16
  Bottom Layer w8: v1(1001.2,1089.94) 1698.2,1089.94 v1(1722.2,1065.94)
NetU1_13: U1.13 U4.17 | length 889.3
  Top Layer w8: v1(1013.2,1048.94) 1035.78,1071.52 U1.13 ; U4.17 v1(1774.2,1041.94)
  Bottom Layer w8: v1(1013.2,1048.94) 1022.2,1039.94 1772.2,1039.94 v1(1774.2,1041.94)
NetU1_14: U1.14
NetU1_15: U1.15
NetU1_16: U1.16
NetU1_17: U1.17
NetU1_18: U1.18
NetU1_19: U1.19
NetU1_25: U1.25
NetU1_26: U1.26
NetU1_27: U1.27
NetU1_28: U1.28
NetU1_29: U1.29
NetU1_30: U1.30 U3.4 | length 1226.5
  Top Layer w8: U1.30 1379.04,1223.09 1398.2,1203.94 v1(1398.2,683.94)
  Bottom Layer w8: U3.4 v1(1398.2,683.94)
NetU1_31: U1.31 U3.1 | length 1140.8
  Top Layer w8: U1.31 1384.81,1242.78 1428.2,1199.39 v1(1428.2,835.94)
  Bottom Layer w8: U3.1 1426.2,833.94 v1(1428.2,835.94)
NetU1_32: U1.32
NetU1_38: U1.38
NetU1_39: U1.39
NetU1_40: U1.40
NetU1_41: U1.41
OSC32_IN: C1.1 U1.3 Y1.2 | length 407
  Top Layer w8: C1.1 820.2,1525.94 830.2,1515.94 Y1.2 866.2,1445.94 917.2,1394.94 917.2,1319.94 935.3,1301.83 U1.3
OSC32_OUT: C2.2 U1.4 Y1.1 | length 379.9
  Top Layer w8: C2.2 769.57,1306.94 811.2,1306.94 830.2,1325.94 Y1.1 874.2,1389.94 899.2,1364.94 899.2,1317.94 ; 899.2,1316.94 899.2,1317.94 ; U1.4 929.53,1282.15 899.2,1312.48 899.2,1317.94
OSC_IN: C3.2 U1.5 Y2.1 | length 624
  Top Layer w8: C3.2 575.83,1068.57 590.2,1082.94 Y2.1 658.2,1147.94 716.2,1205.94 821.2,1205.94 877.72,1262.46 U1.5
OSC_OUT: C4.2 U1.6 Y2.2 | length 441.2
  Top Layer w8: C4.2 836.57,1026.57 782.32,1080.81 Y2.2 799.2,1147.94 894.04,1242.78 U1.6
RS485_N: CN1.4 D3.1 R14.1 U3.7 | length 435.4
  Bottom Layer w15: D3.1 242.6,803.3 R14.1 295.2,893.94 315.2,873.94 CN1.4 485.2,783.94 U3.7
RS485_P: CN1.3 D3.2 R12.2 U3.6 | length 431.2
  Bottom Layer w15: D3.2 244.56,635.9 R12.2 295.2,633.94 335.2,673.94 CN1.3 455.2,733.94 U3.6
SWCLK: P1.3 R1.2 U1.37 | length 474.5
  Top Layer w8: P1.3 1204.2,1629.94 1269.46,1564.67 U1.37
  Bottom Layer w8: R1.2 1182.73,1713.47 P1.3
SWDIO: P1.2 R2.2 U1.34 | length 668.8
  Top Layer w8: P1.2 1304.2,1553.94 1421.2,1436.94 1421.2,1320.94 1402.09,1301.83 U1.34
  Bottom Layer w8: P1.2 1308.73,1730.4 R2.2
VDDA: C5.2 C6.2 C7.2 R5.2 U1.9 | length 622.4
  Top Layer w8: U1.9 936.98,1183.72 925.2,1171.94 925.2,1120.94 957.2,1088.94 v1(957.2,1046.94) 981.7,1022.44 981.7,993.49 C5.2 1041.2,933.99 R5.2
  Bottom Layer w8: v1(957.2,1046.94) 984.63,1019.5 C7.2 C6.2
VSSA: C5.1 C6.1 C7.1 R27.2 U1.8 | length 642
  Top Layer w8: R27.2 922.14,844.46 C5.1 922.14,1069.99 v1(917.2,1074.94) 902.2,1089.94 902.2,1180.94 924.67,1203.41 U1.8
  Bottom Layer w8: C6.1 C7.1 917.2,974.37 v1(917.2,1074.94)
pads on no net: BAT?.0 Designator38.1 Designator39.1 U1.2 U4.6 U4.7 U4.8 U4.9 U4.10 U4.11 U4.12 U4.14 U4.15 U4.18 U4.19 U4.20 U4.21 U4.22 U4.23 U4.26 U4.28 Y1.

## Polygon pours and split planes (outlines as drawn)
GND on Top Layer "GND_TOP" (solid, remove dead copper, pour order 6): 39.37,118.11 3070.87,118.11 3070.87,1889.76 39.37,1889.76
GND on Bottom Layer "GND_BOT" (solid, remove dead copper, pour order 8): 39.37,118.11 3070.87,118.11 3070.87,1889.76 39.37,1889.76

## Keep-outs
Keep-Out Layer:
  the board outline again, w10

## Other copper
Top Layer:
  pour cut-out: 542.2,1489.94 542.2,1358.94 541.2,1357.94 555.2,1343.94 823.2,1343.94 823.2,1481.94 813.2,1491.94 544.2,1491.94
  pour cut-out: 946.91,1242.78 888.45,1242.78 787.4,1141.73 787.4,1072.79 873.14,987.05 873.14,945.43 889.5,945.43 907.87,963.79 907.87,1054.71
  pour cut-out: 720.57,1191.66 662.57,1133.66 622.75,1133.66 601.96,1112.87 601.96,1074.52 590.1,1062.65 590.1,1027.45 803.85,1027.45 807.26,1030.86 807.26,1035.69 768.05,1074.9 768.05,1115.38 746.64,1136.79 746.64,1162.72 764.82,1180.91 771.71,1180.91 772.47,1181.66 771.48,1182.65 771.48,1191.66
  pour cut-out: 1286.98,1107.15 1286.98,996.48 1299.21,984.25 1298.44,983.48 1383.09,983.48 1383.92,984.31 1383.92,1121.97
  pour cut-out: 722.96,1742.09 847.21,1742.09 847.79,1742.67 847.79,1727.5 782.62,1727.5 767.72,1712.6 754.95,1725.37 728.89,1725.37 721.18,1733.08

## Silkscreen, mask and mechanical layers (free items; w line width, h text height)
Top Overlay:
  the board outline again, w10
Mechanical 1:
  the board outline again, w10
Drill Drawing:
  text ".Legend" at 300,3500 h60

## Dimensions
0,2007.87 to 3149.61,2007.87 on Mechanical 15
0,2007.87 to 0,0 on Mechanical 15

## Text inside footprints (layer, text, board x,y; h text height)
D6: Top Overlay "+" at 2868.2,867.94 h59.06 r180
D8: Top Overlay "+" at 2868.2,594.94 h59.06 r180
U8: Top Overlay "3" at 2056.72,244.24 h39.37; Top Overlay "1" at 1968.14,244.24 h39.37; Top Overlay "4" at 1899.24,676.33 h39.37